# Altium PCB 0.PCB1.PcbDoc (part 6 of 8)
Units mil, origin at the board's own origin, x right, y up, seen from the top; angles counter-clockwise.
Board outline 3897.64 x 3897.64 mil, 6 copper layers (Top Layer, Layer 1, Layer 3, Layer 4, Layer 2, Bottom Layer), stack 60.567 mil thick; 715 components, 563 nets, 2530 pads, 1442 vias.
Unrouted connection lines stored in the file: 6.
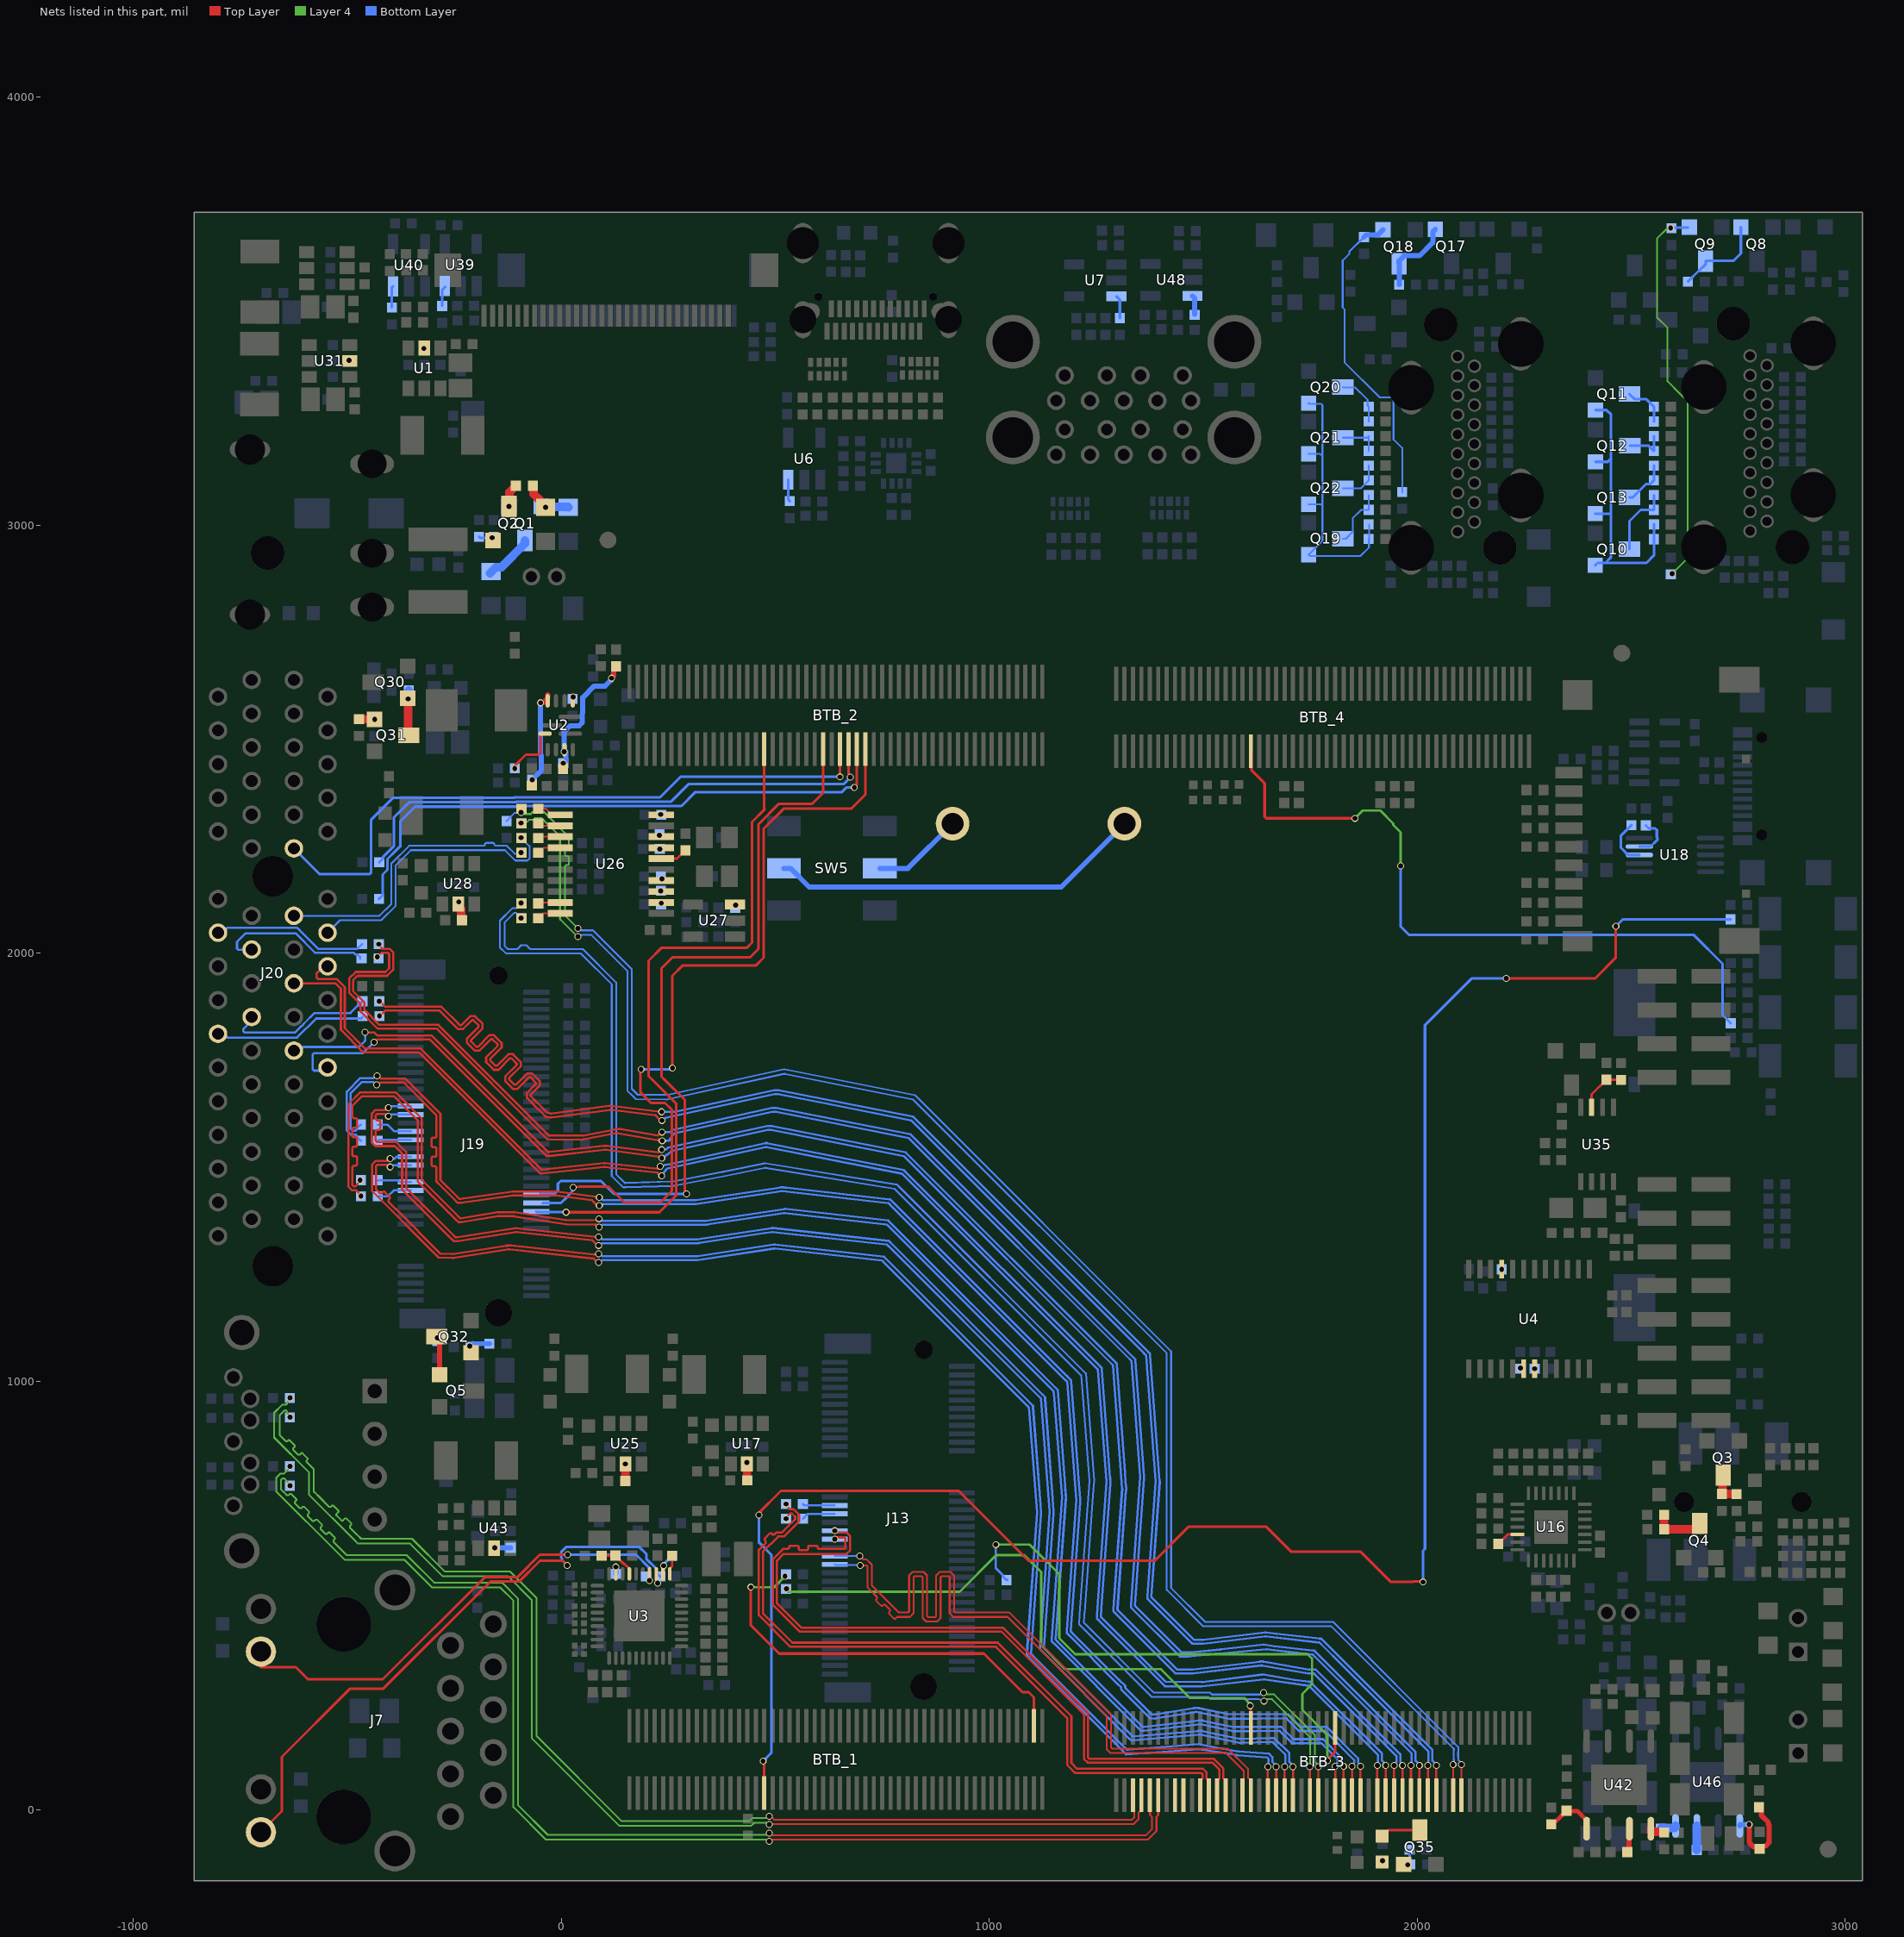
[diagram p10: the nets of this part, all layers, seen from the top]

## Via types
v1: diameter 16.14, hole 11.81, Top Layer to Bottom Layer, tented both sides, 1434 vias
v2: diameter 16.14, hole 11.81, Top Layer to Bottom Layer, 8 vias

## Nets (pads, with @x,y where several pads share a name; then routed paths per layer and width w, separated by ;. In a path a pad name is that pad's centre, name@x,y a point inside that pad or via, vN(x,y) a via of type N, cw(c..) or ccw(c..) an arc to the next point about the centre after c; other vN are vias at no path point) (continued)
NetLED2_1: LED2.1 R128.2
  other v1: 1919.12,-119.98
NetLED2_2: LED2.2 Q35.3 | length 93.7
  Top Layer w6.16: LED2.2@1918.32,-62.6 1932.82,-48.1 Q35.3@2006.02,-48.1
NetQ1_1: Q1.1 Q2.3 R132.2 | length 34.8
  Top Layer w20: Q2.3@-121.2,3063.9 -121.2,3076.78 R132.2@-105.68,3092.3
  other v1: -122,3044.1
NetQ1_2: Q1.2 R127.2 R131.2 R132.1 | length 116.3
  Top Layer w20: R132.1@-66.32,3092.3 -64.52,3090.5 -64.52,3073.32 -48.8,3057.6 -48.8,3052.1 -45.3,3048.6 R131.2@-39.8,3048.6
  Bottom Layer w20: Q1.2@-41.3,3043.5 -40.95,3043.15 15.65,3043.15 R127.2@16.6,3042.2
  other v1: -36.3,3042.1
NetQ1_3: Q1.3 R129.1 | length 117.1
  Bottom Layer w20: R129.1@-166,2888 -151.8,2902.2 -139.4,2902.2 -84.5,2957.1 Q1.3@-84.5,2964.1
NetQ2_1: Q2.1 R133.2 R135.1 | length 31.4
  Bottom Layer w6.16: R135.1@-191.8,2972.92 -189.58,2970.7 R133.2@-161.3,2970.7
  other v1: -161.3,2970.8
NetQ3_3: Q3.3 R122.1 R123.1 | length 79.6
  Top Layer w20: Q3.3@2714.91,780.92 2713.36,779.37 2713.36,738.55 R123.1@2711.81,737 2711.91,736.9 2746.01,736.9 R122.1@2746.11,736.8
NetQ4_3: Q4.3 R124.1 R325.1 | length 125.4
  Top Layer w20: R124.1@2576.71,688.42 2576.9,688.23 2576.9,655.01 R325.1@2577.09,654.82 2652.01,654.82 2660.01,662.82 Q4.3@2660.01,668.22
NetQ5_1: Q5.1 Q32.3 R319.2 | length 88.1
  Top Layer w12: v1(-289.12,1101.85) -284.32,1097.05 Q5.1@-284.32,1015.7
NetQ8_1: Q8.1 Q9.3 R158.2 | length 216.5
  Bottom Layer w6.16: R158.2@2632.62,3569.11 2658.1,3594.59 2658.78,3594.59 2673.7,3609.51 Q9.3@2673.7,3616.51 2674.8,3617.61 2738.7,3617.61 2756.2,3635.11 Q8.1@2756.2,3696.61
NetQ9_1: Q9.1 R159.1 R160.1 | length 912.7
  Layer 4 w4.29: v1(2592.1,3694.4) 2584.7,3694.4 2560,3669.7 2560,3486 2584.7,3461.3 2584.7,3336.3 2612.81,3308.19 2632.2,3288.8 2632.2,2923.46 v1(2595.39,2886.65)
  Bottom Layer w4.29: R159.1@2592.6,2885.12 2594.13,2886.65 v1(2595.39,2886.65)
  Bottom Layer w6.16: R160.1@2594,3695.31 Q9.1@2632.7,3695.31
NetQ10_1: Q10.1 Q11.1 Q12.1 Q13.1 R169.2 R171.1 | length 687.7
  Bottom Layer w6.16: Q13.1@2415.8,3027.21 2450.8,3027.21 2452.2,3028.61 ; Q10.1@2416,2906.51 2421.53,2912.04 2439.63,2912.04 ; Q11.1@2416.1,3268.91 2442.4,3268.91 2447.2,3264.11 2447.91,3264.11 2452.2,3259.82 2452.2,3155.21 ; Q12.1@2416.6,3148.11 2445.1,3148.11 2452.2,3155.21 ; R171.1@2553.42,3002.21 2553.42,2968.01 R169.2@2552.92,2967.51 2552.92,2929.53 2535.43,2912.04 2439.63,2912.04 ; 2439.63,2912.04 2452.2,2924.61 2452.2,3028.61 ; 2452.2,3028.61 2452.2,3155.21
NetQ10_3: Q10.3 R161.2 R162.2 | length 168.1
  Bottom Layer w6.16: Q10.3@2496,2944.01 2496,3009.81 2522.17,3035.99 R161.2@2553.02,3035.99 R162.2@2553.02,3070.39
NetQ11_3: Q11.3 R163.2 R164.2 | length 103.6
  Bottom Layer w6.16: Q11.3@2496.1,3306.41 2508.29,3294.22 2535.59,3294.22 R164.2@2553.02,3276.79 R163.2@2553.02,3242.39
NetQ12_3: Q12.3 R165.2 R166.2 | length 95.8
  Bottom Layer w6.16: Q12.3@2496.6,3185.61 2540.99,3185.61 R165.2@2553.02,3173.59 R166.2@2553.02,3207.99
NetQ13_3: Q13.3 R167.2 R168.2 | length 108.2
  Bottom Layer w6.16: Q13.3@2495.8,3064.71 2502.8,3064.71 2534.15,3096.07 2544.3,3096.07 R167.2@2553.02,3104.79 R168.2@2553.02,3139.19
NetQ17_1: Q17.1 Q18.3 R179.2 | length 185.4
  Bottom Layer w12: R179.2@1957.94,3561.94 1957.94,3610.3 Q18.3@1957.7,3610.54 1957.7,3617.54 1969.7,3629.54 2005.6,3629.54 2036.6,3660.54 2036.6,3685.44 Q17.1@2042.3,3691.14
NetQ18_1: Q18.1 R180.1 R181.1 | length 741.9
  Bottom Layer w4.29: R181.1@1875.6,3673.32 1841.3,3639.02 1841.3,3633.76 1825.75,3618.22 1825.75,3508.89 1830.21,3504.44 1830.21,3380.94 1912.51,3298.64 1939.88,3298.64 1944.72,3293.8 1944.72,3200.61 1965,3180.33 R180.1@1965,3077.48
  Bottom Layer w12: R181.1@1875.6,3673.32 1880.82,3678.54 1908.2,3678.54 Q18.1@1920.2,3690.54
NetQ19_1: Q19.1 Q20.1 Q21.1 Q22.1 R190.2 R192.1 | length 669.2
  Bottom Layer w4.29: Q22.1@1746.4,3049.08 1775.46,3049.08 1778.6,3045.94 ; Q21.1@1746.4,3167.11 1772.63,3167.11 1778.6,3161.14 ; Q20.1@1746.4,3285.14 1748.2,3283.34 1776.08,3283.34 1778.6,3280.83 1778.6,3161.14 ; R190.2@1887.42,3001.84 1887.42,2968.04 1887.22,2967.84 1887.22,2948.06 1867.6,2928.44 1749,2928.44 Q19.1@1746.4,2931.04 1778.6,2963.24 1778.6,3045.94 ; 1778.6,3045.94 1778.6,3161.14
NetQ19_3: Q19.3 R182.2 R183.2 | length 141.4
  Bottom Layer w4.29: Q19.3@1826.4,2968.54 1833.4,2968.54 1849.25,2984.4 1849.25,3016.2 1869,3035.94 R182.2@1886.82,3035.94 R183.2@1886.82,3070.42
NetQ20_3: Q20.3 R184.2 R185.2 | length 121.4
  Bottom Layer w4.29: Q20.3@1826.4,3322.64 1827.22,3321.82 1855.32,3321.82 1884.18,3292.96 1884.18,3279.88 R185.2@1886.82,3277.24 R184.2@1886.82,3242.77
NetQ21_3: Q21.3 R186.2 R187.2 | length 96.4
  Bottom Layer w4.29: Q21.3@1826.4,3204.61 1883.13,3204.61 R187.2@1886.82,3208.3 R186.2@1886.82,3173.83
NetQ22_3: Q22.3 R188.2 R189.2 | length 102.5
  Bottom Layer w4.29: Q22.3@1826.4,3086.58 1868.51,3086.58 R188.2@1886.82,3104.89 R189.2@1886.82,3139.36
NetQ30_1: Q30.1 Q31.3 R255.2 | length 107.7
  Top Layer w20: Q30.1@-358.85,2595.85 v1(-357.5,2594.5) -357.5,2510.7 Q31.3@-356.15,2509.35
  Bottom Layer w20: v1(-357.5,2594.5) -356.05,2595.95 R255.2@-356.05,2613.99
NetQ31_1: Q31.1 R256.2 R257.1 | length 36.4
  Top Layer w20: R256.2@-472.35,2547.25 -472.15,2547.05 -436.35,2547.05 Q31.1@-436.15,2546.85
  other v1: -435.6,2546.8
NetQ32_1: Q32.1 R320.2 R321.1 | length 57.2
  Bottom Layer w12: v1(-213.52,1082.37) R321.1@-212.4,1082.37 ; R321.1@-206.17,1088.6 R321.1@-212.4,1082.37 ; R320.2@-167.48,1088.1 -203.92,1088.1 -209.65,1082.37 R321.1@-212.4,1082.37
NetQ35_1: Q35.1 R334.2 R335.1 | length 37.5
  Bottom Layer w6.16: v1(1977.82,-129.3) 1982.54,-124.58 R334.2@1982.54,-93.8
NetR6_1: R6.1 U1.5
  other v1: -320.7,3413.07
NetR8_1: R8.1 U2.8 | length 133
  Top Layer w6.16: v1(-108.31,2432.09) -108.31,2438.08 -82.52,2463.87 -52.47,2463.87 -47.99,2468.35 -47.99,2511.4 -46.29,2513.1 U2.8@-37.56,2513.1
NetR12_2: R12.2 R13.1 R17.1 U2.11 | length 296.8
  Top Layer w12: v1@117.5,2643.4 117.5,2643.77 122.38,2648.65 122.38,2661.43 R13.1@128.18,2667.23
  Bottom Layer w12: v1(5.01,2444.35) 10.81,2450.15 v1@10.81,2470.79 ; v1(6.71,2470.79) 6.71,2517.29 21.03,2531.61 42.21,2531.61 49.24,2538.64 49.24,2559.82 50.61,2561.19 50.61,2597.61 77.24,2624.24 102.47,2624.24 115.43,2637.2 v1@116.55,2637.2
  other v1: 117.55,2642.7
NetR14_2: R14.2 R18.1 U2.6 | length 218.8
  Top Layer w12: v1(-47.99,2585.29) -47.2,2586.08 -41.04,2586.08 -31.62,2595.51 U2.6@-31.62,2604.18
  Bottom Layer w12: v1(-67.79,2405.63) -45.99,2427.43 -45.99,2461.49 -47.99,2463.49 v1(-47.99,2585.29)
NetR15_2: R15.2 U2.3
  other v1: 28.46,2598.83
NetR38_1: R38.1 U4.6
  other v1: 2240.99,1031.07
NetR39_1: R39.1 U4.7
  other v1: 2274.2,1029.63
NetR43_2: R43.2 U4.21
  other v1: 2197.42,1261.94
NetR53_1: R53.1 U3.39 | length 16
  Bottom Layer w12: R53.1@127.77,550.54 v1(127.77,566.53)
NetR63_2: R63.2 U3.31 | length 43.9
  Top Layer w5.61: U3.31@253.76,550.54 253.76,562.78 259.06,568.09 R63.2@259.06,592.2
NetR65_1: R65.1 U31.5
  other v1: -495.45,3384.9
NetR74_1: R74.1 U3.32 | length 51
  Top Layer w6.16: U3.32@238.01,550.54 238.49,551.02 238.49,568.82 v1(239.23,569.56)
  Bottom Layer w6.16: v1(239.23,569.56) 241.14,571.47 241.14,574.88 R74.1@259.06,592.8
NetR95_1: R95.1 U6.3 | length 51.5
  Bottom Layer w6.16: U6.3@530.6,3106.39 530.6,3059.7 R95.1@534,3056.3
NetR99_1: R99.1 U7.3 | length 54.1
  Bottom Layer w6.16: U7.3@1297.21,3534.63 1305.3,3526.54 R99.1@1305.3,3483.91
NetR121_2: R121.2 U16.26 | length 53.9
  Top Layer w6.16: R121.2@2189.31,620.45 2211.06,642.2 U16.26@2234.23,642.2
NetR139_1: R139.1 R140.1 U17.5 | length 44.2
  Top Layer w12: R139.1@433.4,771.3 R139.1@434.32,772.22 ; U17.5@433.9,807.1 v1(433.9,811.04) U17.5@434.32,810.62
  Top Layer w20: R139.1@434.32,772.22 U17.5@434.32,810.62
NetR221_1: R221.1 R222.1 U25.5 | length 39.9
  Top Layer w20: R222.1@149.8,767.4 150,767.6 150,806.96 v1(150.2,807.16)
NetR225_2: R225.2 U26.3
  other v1: 232.28,2145.93
NetR226_2: R226.2 U26.2
  other v1: 234.08,2117.03
NetR230_2: R230.2 U26.6 | length 64.2
  Top Layer w6.16: U26.6@234.03,2221.2 270.81,2221.2 R230.2@290.18,2240.57
NetR233_1: R233.1 U26.4
  other v1: 235.35,2174.33
NetR234_1: R234.1 U26.10
  other v1: 232.78,2324.63
NetR246_1: R246.1 U27.3
  other v1: 407.69,2112.74
NetR251_1: R251.1 R252.1 U28.5 | length 45.8
  Top Layer w20: v1(-239.28,2120) -239.28,2109.82 -233.38,2103.92 -233.38,2079.2 R251.1@-231.58,2077.4
NetR276_2: R276.2 R277.1 U35.7 | length 111.5
  Top Layer w6.16: U35.7@2407.5,1640.31 2407.5,1670.4 R276.2@2442,1704.9 ; R276.2@2444.2,1705.3 2445.1,1704.4 R277.1@2476.5,1704.4
NetR290_1: R290.1 U18.9 | length 102
  Bottom Layer w6.16: U18.9@2519.02,2249.52 2545.39,2249.52 2560.92,2265.05 2560.92,2270.15 2559.91,2271.17 2559.91,2288.28 2556.3,2291.89 2541.29,2291.89 R290.1@2534.26,2298.92
NetR291_1: R291.1 U18.8 | length 113
  Bottom Layer w6.16: R291.1@2500.66,2299.52 2476.16,2275.02 2476.16,2246.32 2492.64,2229.84 U18.8@2519.02,2229.84
NetR308_1: R308.1 U39.3 | length 48.2
  Bottom Layer w6.16: R308.1@-278.1,3512.3 -278.1,3550 U39.3@-270.7,3557.4
NetR309_1: R309.1 U40.3 | length 50.3
  Bottom Layer w6.16: R309.1@-395.5,3508.8 -395.5,3555.29 U40.3@-392.8,3557.99
NetR317_1: R317.1 R318.1 U43.5 | length 38.9
  Top Layer w12: U43.5@-156.42,610.32 -155.88,610.32 v1(-154.92,611.29)
  Bottom Layer w12: v1(-154.92,611.29) -154.86,611.35 -117.98,611.35 R317.1@-117.92,611.41
NetR323_1: R323.1 U48.3 | length 44.8
  Bottom Layer w12: U48.3@1475.01,3535.53 1479.98,3530.56 R323.1@1479.98,3492.83
NetR343_2: R343.2 U42.4 | length 37.4
  Top Layer w20: U42.4@2545.91,-44.91 2545.91,-49.85 2548.04,-51.97 2574.91,-51.97 R343.2@2576.71,-53.77
NetR344_2: R344.2 U42.3 | length 56.7
  Top Layer w12: R344.2@2491.09,-99.65 2495.19,-95.55 2495.19,-45.63 U42.3@2495.91,-44.91
NetR345_2: R345.2 R346.1 U42.1 | length 127.9
  Top Layer w10: R346.1@2310.5,-32.7 2315.62,-27.58 2324.08,-27.58 R345.2@2348.81,-2.85 ; R345.2@2347.8,-4.1 2373.24,-4.1 2374.01,-3.33 2395.91,-25.23 U42.1@2395.91,-44.91
NetR349_2: R349.2 U46.4 | length 38.5
  Bottom Layer w20: R349.2@2569.01,-44.65 2570.81,-42.85 2601.28,-42.85 2603.41,-40.73 U46.4@2603.41,-38.21
NetR350_2: R350.2 U46.3 | length 56.6
  Bottom Layer w20: R350.2@2652.91,-94.65 2653.16,-94.4 2653.16,-38.46 U46.3@2653.41,-38.21
NetR351_2: R351.2 R352.1 U46.1 | length 212.8
  Top Layer w12: v1(2775.44,-35.22) 2776.23,-36.01 2776.23,-77.73 2786.31,-87.81 2803.66,-87.81 2805.58,-85.88 2813.27,-85.88 2821.7,-77.45 2821.7,-36.38 2820.3,-34.98 2820.3,-30.1 2804.4,-14.2 2804.4,-0.78 R352.1@2798.6,5.02
  Bottom Layer w12: U46.1@2753.41,-38.21 2753.41,-36.95 2755.14,-35.22 v1(2775.44,-35.22)
NetR386_1: R386.1 R387.2 U3.37 | length 89.4
  Top Layer w6.16: R387.2@94.58,592.71 94.96,593.08 R386.1@126.68,593.08 146.1,573.66 147.95,573.66 159.27,562.34 U3.37@159.27,550.54
NetSPK1_1: SPK1.1 SW5.2 | length 875.3
  Bottom Layer w12: SW5.2@520.09,2198.6 535.84,2198.6 579.44,2155 1168.2,2155 SPK1.1@1316.1,2302.9
NetSPK1_2: SPK1.2 SW5.5 | length 213.2
  Bottom Layer w12: SW5.5@744.49,2198.6 810.23,2198.6 SPK1.2@914.53,2302.9
OE: R223.2 U26.8
  other v1: 229.58,2275.53
PCIE20_0_REFCLKN: BTB_3.93
PCIE20_0_REFCLKP: BTB_3.92
PCIE20_0_RXN: BTB_3.98 C297.1 | length 2794
  Top Layer w4.29: v1(486.2,-15.58) 489.41,-15.58 497.58,-23.74 717.32,-23.74 1333.4,-23.75 1338.96,-18.18 1338.96,-6.57 1338.63,-6.24 1338.63,30.4 BTB_3.98@1335.86,33.17
  Layer 4 w4.21: v1(-633.76,916.2) -633.76,919.43 -640.56,926.23 -640.56,929.86 -643.03,932.33 -646.51,932.33 -657.6,921.24 -657.6,874.4 -652,868.8 -650.51,867.31 -643.28,860.08 -639.8,860.08 -637.34,862.54 -634.34,862.54 -622.34,850.55 -622.34,847.55 -626.27,843.62 -626.27,840.62 -614.27,828.62 -611.27,828.62 -607.34,832.55 -604.34,832.55 -592.34,820.55 -592.34,817.55 -594.8,815.09 -594.8,811.6 -578.09,794.89 -578.09,790.41 -578.09,743.09 -569.55,734.55 -568.06,733.06 -541.87,706.87 -538.38,706.87 -535.2,710.04 -532.2,710.04 -520.21,698.05 -520.21,695.05 -525.1,690.15 -525.1,687.15 -513.1,675.15 -510.1,675.15 -505.21,680.05 -502.21,680.05 -490.21,668.05 -490.21,665.05 -493.39,661.87 -493.39,658.39 -478.39,643.39 -476.9,641.9 -467.38,632.38 -348.42,632.38 -271.77,555.72 -119.02,555.72 -57.49,494.19 -57.49,171.54 141.23,-27.18 439.1,-27.18 446.46,-19.81 478.73,-19.81 482.97,-15.58 v1(486.2,-15.58)
PCIE20_0_RXP: BTB_3.97 C298.1 | length 2796.4
  Top Layer w4.29: v1(486.21,-35.26) 487.44,-34.03 713.06,-34.03 1337.66,-34.04 1349.25,-22.45 1349.25,-7.57 1355.54,-1.28 BTB_3.97@1355.54,33.17
  Layer 4 w4.21: v1(-633.76,961.4) -633.76,958.17 -640.56,951.37 -640.56,947.74 -643.03,945.27 -651.87,945.27 -670.54,926.6 -670.54,869.04 -589.3,787.8 -589.3,735.5 -482.41,628.61 -475.06,621.26 -472.11,621.26 -472.02,621.17 -353.07,621.17 -276.41,544.51 -123.67,544.51 -68.7,489.55 -68.7,166.9 136.59,-38.39 443.74,-38.39 451.1,-31.02 478.75,-31.02 482.99,-35.26 v1(486.21,-35.26)
PCIE20_0_TXN: BTB_3.95 C296.1 | length 2849.2
  Top Layer w4.29: v1(486.02,-74.63) 489.23,-74.63 493.5,-70.36 1370.68,-70.36 1390.86,-50.18 1390.86,-17.12 1394.91,-13.07 BTB_3.95@1394.91,33.17
  Layer 4 w4.21: v1(-633.76,801.6) -633.76,798.37 -642,790.13 -642,790.02 -647.37,784.65 -655.5,784.65 -665.51,774.64 -665.51,743.1 -523.44,601.03 -505.4,582.99 -365.49,582.99 -301.28,518.78 -142.73,518.78 -111.61,487.66 -111.61,5.36 -35.86,-70.39 478.56,-70.39 482.8,-74.63 v1(486.02,-74.63)
PCIE20_0_TXP: BTB_3.96 C295.1 | length 2849
  Top Layer w4.29: v1(486.06,-54.94) 488.84,-54.94 493.96,-60.07 1366.42,-60.07 1380.57,-45.92 1380.57,-17.35 1375.85,-12.63 1375.85,32.55 BTB_3.96@1375.23,33.17
  Layer 4 w4.21: v1(-633.76,756.5) -633.76,759.73 -642,767.97 -642,768.08 -647.37,773.44 -650.85,773.44 -654.3,770 -654.3,747.74 -649.67,743.12 -648.19,741.63 -640.47,733.91 -636.98,733.91 -633.74,737.16 -630.74,737.16 -618.74,725.16 -618.74,722.16 -622.23,718.67 -622.23,715.67 -610.23,703.67 -607.23,703.67 -603.74,707.16 -600.74,707.16 -588.74,695.16 -588.74,692.16 -592.23,688.67 -592.23,685.68 -580.23,673.68 -577.23,673.68 -573.75,677.17 -570.75,677.17 -558.75,665.17 -558.75,662.17 -562.24,658.68 -562.24,655.68 -550.24,643.68 -547.24,643.68 -543.75,647.17 -540.75,647.17 -528.75,635.17 -528.75,632.17 -532,628.93 -532,625.44 -517,610.44 -515.51,608.95 -500.76,594.2 -360.85,594.2 -296.63,529.99 -138.09,529.99 -100.4,492.3 -100.4,10 -31.22,-59.18 478.59,-59.18 482.83,-54.94 v1(486.06,-54.94)
PCIE20_1_REFCLKN: BTB_3.85 J13.49 | length 1687.3
  Top Layer w4.29: v1(698.8,570.4) 713.17,570.4 715.68,567.89 715.68,518.96 721.42,513.22 738,496.65 738,493.1 735.75,490.85 735.75,487.84 747.79,475.8 750.8,475.8 753.32,478.32 756.33,478.32 768.38,466.27 768.38,463.26 765.86,460.75 765.86,457.73 777.9,445.69 780.91,445.69 784.92,449.7 795.2,449.7 805.3,449.7 814.72,449.7 823.26,458.24 823.26,542.68 825.39,544.8 842.42,544.8 844.55,542.68 844.55,447.25 852.71,439.09 878.27,439.09 886.42,447.25 886.42,542.68 888.55,544.8 905.58,544.8 907.71,542.68 907.71,458.24 916.25,449.7 1022,449.7 1043.05,449.7 1274.5,218.25 1274.5,140.54 1283.04,132 1553.01,132 1594.86,90.15 1594.86,72.91 1594.54,72.59 1594.54,35.95 BTB_3.85@1591.76,33.17
  Bottom Layer w4.29: J13.49@639.2,572.46 640.23,571.43 697.77,571.43 v1(698.8,570.4)
PCIE20_1_REFCLKP: BTB_3.84 J13.47 | length 1687.2
  Top Layer w4.29: v1(697.35,592.14) 698.17,592.14 705.79,584.52 713.6,584.52 725.97,572.15 725.97,523.23 789.21,459.99 805.3,459.99 810.46,459.99 812.97,462.5 812.97,546.94 821.13,555.09 846.69,555.09 854.84,546.94 854.84,451.51 856.97,449.38 874,449.38 876.13,451.51 876.13,546.94 884.29,555.09 909.85,555.09 918,546.94 918,462.5 920.52,459.99 1022,459.99 1047.31,459.99 1284.79,222.51 1284.79,144.8 1287.3,142.29 1557.28,142.29 1605.15,94.41 1605.15,73.92 1611.45,67.62 BTB_3.84@1611.45,33.17
  Bottom Layer w4.29: J13.47@639.2,592.14 v1(697.35,592.14)
PCIE20_1_RXN: BTB_3.88 J13.43 | length 1685.9
  Top Layer w5.15: v1(639.2,631.51) 642.18,631.51 646.22,635.55 661.74,635.55 663.53,633.76 663.53,610.49 661.74,608.7 637.6,608.7 602.26,608.7 599.24,611.72 599.24,614.05 597.03,616.26 579.31,616.26 577.09,614.05 577.09,608.46 574.88,606.25 557.16,606.25 554.94,608.46 554.94,614.05 552.73,616.26 535.01,616.26 532.79,614.05 532.79,611.72 529.78,608.7 527.2,608.7 518.3,608.7 494.88,585.28 494.88,477.78 557.01,415.65 1028.45,415.65 1221.5,222.6 1221.5,117.93 1229.88,109.55 1520.9,109.55 1537.98,92.47 1537.98,72.89 1532.71,67.62 BTB_3.88@1532.71,33.17
PCIE20_1_RXP: BTB_3.87 J13.41 | length 1684.4
  Top Layer w5.15: v1(639.2,651.2) 642.18,651.2 646.22,647.15 666.54,647.15 675.13,638.57 675.13,605.69 666.54,597.1 519.64,597.1 504.03,581.49 504.03,481.57 560.8,424.8 1032.24,424.8 1230.65,226.39 1230.65,121.72 1233.67,118.7 1524.69,118.7 1547.13,96.26 1547.13,72.89 1552.39,67.62 BTB_3.87@1552.39,33.17
PCIE20_1_TXN: BTB_3.90 C252.1 | length 1622.5
  Top Layer w5.15: v1(525.61,679.25) 525.61,682.22 534.82,691.44 539.09,691.44 546.58,683.94 546.58,677.89 528.85,660.15 516.2,647.5 502.95,647.5 498.02,642.58 493.76,642.58 490.87,645.46 487.74,645.46 475.21,632.93 475.21,629.8 478.09,626.92 478.09,622.65 476.27,620.83 461.72,606.28 461.72,454.3 535.98,380.05 1016.18,380.05 1182.15,214.08 1182.15,104.41 1201.48,85.07 1209.63,85.07 1209.96,85.41 1495.59,85.41 1498.27,82.73 1498.27,72.55 1493.34,67.62 BTB_3.90@1493.34,33.17
PCIE20_1_TXN_R: C252.2 J13.37 | length 78.9
  Bottom Layer w5.15: C252.2@564.97,679.25 576.29,690.57 J13.37@639.2,690.57
PCIE20_1_TXP: BTB_3.89 C251.1 | length 1626.3
  Top Layer w5.15: v1(525.61,713.45) 525.61,710.48 534.82,701.26 543.16,701.26 556.41,688.01 556.41,673.82 520.27,637.68 507.02,637.68 471.55,602.21 471.55,458.37 540.05,389.88 1020.25,389.88 1191.98,218.15 1191.98,108.48 1205.55,94.9 1205.89,95.24 1499.66,95.24 1508.09,86.8 1508.09,72.55 1513.02,67.62 BTB_3.89@1513.02,33.17
PCIE20_1_TXP_R: C251.2 J13.35 | length 75.6
  Bottom Layer w5.15: C251.2@564.97,713.45 568.17,710.25 J13.35@639.2,710.25
PCIE30_PORT0_REF_CLKN: BTB_3.77 R217.2 R219.1 | length 3540.5
  Top Layer w4.29: v1(1749.14,100.02) 1749.24,99.92 BTB_3.77@1749.24,33.17
  Layer 4 w4.21: v1(1641.79,253.32) 1645.66,254.54 1648.77,257.65 1661.1,257.65 1749.69,169.05 1749.69,100.57 v1(1749.14,100.02)
  Bottom Layer w4.29: R219.1@-92.88,2116.63 -104.15,2105.36 -114.1,2105.36 -143,2076.46 -143,2013.75 -128.75,1999.5 46.26,1999.5 118.21,1927.55 118.21,1488.42 118.21,1479.84 140.29,1457.76 144.56,1453.49 150.8,1453.49 262.77,1456.64 263.96,1456.87 379.96,1479.63 473.86,1498.48 476.11,1498.93 476.88,1498.93 778.46,1450.18 1215.48,1013.15 1234.06,768.23 1234.06,767.85 1233.99,766.84 1211.48,455.42 1209.9,433.5 1210.01,432.89 1211.27,431.64 1379.99,262.91 1511.21,262.91 1516.01,258.11 1628.81,258.11 v1(1641.79,253.32)
  other v1: -94.08,2117.73
PCIE30_PORT0_REF_CLKN_R: R217.1 U26.19 | length 52.2
  Top Layer w4.29: R217.1@-53.52,2116.63 -51.31,2118.84 U26.19@-2.19,2118.84
PCIE30_PORT0_REF_CLKP: BTB_3.76 R216.2 R220.1 | length 3536.8
  Top Layer w4.29: BTB_3.76@1768.93,33.17 1768.93,99.95 v1(1769.02,100.03)
  Layer 4 w4.21: v1(1641.2,273.2) 1644.43,273.2 1648.77,268.86 1665.74,268.86 1760.9,173.7 1760.9,111.38 1769.02,103.26 v1(1769.02,100.03)
  Bottom Layer w4.29: v1(-94.08,2082.73) -102.53,2091.19 -102.53,2092.15 -105.05,2094.66 -109.66,2094.66 -132.3,2072.03 -132.3,2017.6 -124.49,2009.79 -112.3,2009.79 -102.14,2009.79 -97.88,2014.05 -97.88,2014.69 -93.63,2018.95 -80.85,2018.95 -76.59,2014.69 -76.59,2014.05 -72.34,2009.79 -48.9,2009.79 50.52,2009.79 128.5,1931.81 128.5,1484.1 144.43,1468.17 148.82,1463.78 150.66,1463.78 260.75,1466.88 261.93,1467.11 378.92,1489.91 473.67,1508.93 475.09,1509.22 477.71,1509.22 784.83,1459.57 788.16,1456.24 1217.42,1026.98 1222.02,1022.38 1226.29,1018.11 1245.21,768.65 1245.21,767.45 1245.17,766.86 1243.76,747.34 1222.96,459.58 ; 1222.6,459.3 1222.51,458.28 1222.26,455.39 1222.21,454.77 1222.21,451.02 1221.89,450.7 1221.01,438.57 1221.01,436.64 1225.59,432.06 1381.74,275.71 1384.26,273.2 1386.03,273.2 1515.47,273.2 1520.27,268.4 1633.19,268.4 1637.99,273.2 v1(1641.2,273.2)
PCIE30_PORT0_REF_CLKP_R: R216.1 U26.20 | length 56.1
  Top Layer w4.29: R216.1@-53.52,2081.63 -41.9,2093.25 U26.20@-2.19,2093.25
PCIE30_PORT0_RX0N: BTB_3.82 J19.41 | length 3241.3
  Top Layer w5.15: v1(-399.4,1520.6) -402.37,1520.6 -407.64,1515.33 -432.89,1515.33 -441.27,1506.96 -441.27,1444.53 -290.09,1293.34 -286.09,1289.35 -254.11,1288.32 -252.78,1288.32 -251.7,1288.49 -123.03,1308.37 -121.45,1308.61 -120.77,1308.61 75.76,1286.99 79.31,1283.43 84.56,1278.19 v1(87.53,1278.19) ; BTB_3.82@1650.82,33.17 v1(1650.82,100.1)
  Bottom Layer w5.15: v1(-399.4,1520.6) -388.96,1520.6 -384.59,1524.97 J19.41@-351.5,1524.97 ; v1(87.53,1278.19) 90.51,1278.19 95.77,1283.46 319.18,1283.46 496.56,1310.13 498.13,1310.37 498.8,1310.37 749.82,1282.44 753.36,1278.9 1089.51,942.75 1093.26,939 1111.82,694.31 1111.88,693.44 1111.88,693.06 1088.3,366.7 1088.3,360.26 1092.49,356.07 1319.51,129.05 ; 1320.6,128.4 1489.73,140.53 1549.3,132.34 1549.64,132.29 1576,127.38 1577.33,127.13 1577.74,126.73 1580.62,126.52 1580.95,126.46 1581.46,126.46 1649.69,121.51 1652.56,118.65 1652.56,101.84 v1(1650.82,100.1)
PCIE30_PORT0_RX0P: BTB_3.81 J19.43 | length 3242.1
  Top Layer w5.15: v1(-399.4,1500.92) -402.37,1500.92 -407.64,1506.18 -429.1,1506.18 -432.12,1503.17 -432.12,1448.38 -432.12,1448.32 -430.33,1446.53 -423.56,1439.76 -419.3,1439.76 -415.68,1443.38 -412.55,1443.38 -400.02,1430.85 -400.02,1427.72 -403.63,1424.1 -403.63,1419.83 -387.97,1404.17 -386.75,1402.95 -386.15,1402.35 -282.17,1298.37 -253.96,1297.47 -253.49,1297.47 -252.25,1297.66 -129.45,1316.64 -128.87,1317.16 -127.35,1317.18 -125.81,1317.2 -125.52,1317.24 -125,1317.76 -117.33,1317.76 -116.97,1317.4 76.26,1296.14 85.79,1296.14 v1(87.53,1297.88) ; BTB_3.81@1670.5,33.17 v1(1670.5,100.1)
  Bottom Layer w5.15: v1(-399.4,1500.92) -395.03,1505.29 J19.43@-351.5,1505.29 ; v1(87.53,1297.88) 90.51,1297.88 95.77,1292.61 318.5,1292.61 496.38,1319.36 497.44,1319.52 499.31,1319.52 754.02,1291.18 757.56,1287.63 1095.9,949.3 1102.41,942.79 1102.41,939.35 1119.71,711.25 1119.98,710.98 1119.98,707.71 1120.76,697.33 1121.03,697.06 1121.03,689.45 1120.78,689.2 1097.45,366.37 1097.45,364.05 1101.92,359.58 1317.25,144.25 1321.73,139.77 1324.06,139.77 1490.84,152.44 1491.51,152.44 1493.16,152.13 1581.01,135.75 1581.8,135.61 1653.75,130.39 1661.71,122.44 1661.71,111.34 1670.5,102.54 v1(1670.5,100.1)
PCIE30_PORT0_RX1N: BTB_3.80 J19.29 | length 3395.1
  Top Layer w5.15: v1(-403.4,1639.3) -406.37,1639.3 -411.64,1634.03 -434.02,1634.03 -442.4,1625.66 -442.4,1558.18 -434.02,1549.8 -389.04,1549.8 -371.59,1532.35 -371.59,1448.45 -254.71,1331.57 -250.84,1327.7 -241.41,1327.7 -105.98,1348.63 -104.39,1348.88 -103.71,1348.88 73.25,1329.4 76.8,1325.85 81.08,1321.57 85.09,1317.56 v1(87.53,1317.56) ; BTB_3.80@1690.19,33.17 v1(1690.19,100.1)
  Bottom Layer w5.15: v1(-403.4,1639.3) -400.43,1639.3 -396.65,1643.08 J19.29@-351.5,1643.08 ; v1(87.53,1317.56) 90.51,1317.56 95.77,1322.83 321.14,1322.83 321.69,1323.38 323.18,1323.6 476.5,1346.66 493.7,1349.25 494.37,1349.25 761.42,1319.54 764.97,1315.99 1117.73,963.23 1121.47,959.49 1141.4,696.73 1141.47,695.86 1141.47,695.48 1118.73,380.77 1118.73,374.33 1327.31,165.75 1331.5,161.56 1338.02,161.56 1491.78,174.57 1493.31,174.7 1494.06,174.7 1584.59,156.09 1586.02,155.8 1587.64,155.8 1659.73,157.61 1661.89,157.61 1666.15,153.45 1688.91,131.24 1691.93,128.22 1691.93,101.84 v1(1690.19,100.1)
PCIE30_PORT0_RX1P: BTB_3.79 J19.31 | length 3394.8
  Top Layer w5.15: v1(-403.4,1619.62) -406.37,1619.62 -411.64,1624.88 -430.23,1624.88 -433.25,1621.87 -433.25,1619.13 -433.25,1613.01 -430.23,1609.99 -424.37,1609.99 -422.15,1607.78 -422.15,1590.06 -424.37,1587.84 -430.23,1587.84 -433.25,1584.83 -433.25,1561.97 -431.38,1560.1 -430.23,1558.95 -385.25,1558.95 -362.44,1536.14 -362.44,1452.24 -249.27,1339.07 -247.05,1336.85 -243.56,1336.85 -242.32,1337.19 -106.79,1358.14 -105.2,1358.38 -104.52,1358.38 v1(87.53,1337.25) ; BTB_3.79@1709.87,33.17 v1(1709.87,100.1)
  Bottom Layer w5.15: v1(-403.4,1619.62) -400.43,1619.62 -396.64,1623.4 J19.31@-351.5,1623.4 ; v1(87.53,1337.25) 90.51,1337.25 95.77,1331.98 317.35,1331.98 491.96,1358.24 493.02,1358.4 494.88,1358.4 765.62,1328.28 769.17,1324.73 1124.61,969.29 1130.62,963.28 1130.62,959.83 1148.27,727.16 1148.54,726.9 1148.54,723.62 1150.35,699.75 1150.62,699.48 1150.62,691.87 1150.36,691.62 1127.88,380.44 1127.88,378.12 1132.33,373.67 1330.77,175.23 1335.29,170.71 1337.64,170.71 1487.17,183.36 1487.44,183.63 1489.79,183.63 1490,183.85 1497.67,183.85 1498.37,183.15 1585.41,165.26 1586.95,164.95 1587.53,164.95 1657.95,166.72 1657.99,166.76 1665.68,166.76 1667.04,165.4 1667.69,165.4 1701.08,132.01 1701.08,111.34 1709.87,102.54 v1(1709.87,100.1)
PCIE30_PORT0_TX0N: BTB_3.74 C177.1 | length 3740.5
  Top Layer w5.15: v1(-469.7,1470.1) -469.7,1467.13 -476.95,1459.88 -476.95,1459.24 -480.59,1455.59 -484.85,1455.59 -487.87,1458.61 -487.87,1476.44 -487.87,1501.17 -484.85,1504.18 -479.46,1504.18 -477.25,1506.4 -477.25,1524.12 -479.46,1526.33 -485.66,1526.33 -487.87,1528.55 -487.87,1546.27 -485.66,1548.48 -479.46,1548.48 -477.25,1550.7 -477.25,1568.42 -479.46,1570.63 -485.66,1570.63 -487.87,1572.85 -487.87,1590.57 -485.66,1592.78 -479.46,1592.78 -477.25,1595 -477.25,1612.72 -479.46,1614.93 -484.85,1614.93 -487.87,1617.95 -487.87,1644.13 -484.73,1647.26 -465.65,1666.35 -390.79,1666.35 -335,1610.56 -335,1467.1 -244.39,1376.5 -240.21,1372.31 -233.16,1372.31 -148.41,1385.7 -109.88,1385.7 -108.81,1385.54 12.69,1367.1 78.11,1366.13 ; 80.56,1366.78 86.97,1360.37 v1(88.38,1360.37) ; BTB_3.74@1808.3,33.17 v1(1808.27,101.06)
  Bottom Layer w5.15: v1(88.38,1360.37) 90.72,1360.37 96.58,1366.23 320.62,1366.23 324.66,1365.94 327.18,1365.94 328.02,1366.07 329.08,1366.23 341.99,1366.23 342.54,1366.77 520.29,1393.31 521.86,1393.54 522.53,1393.54 755.82,1367.3 761.32,1366.22 1150.56,976.98 1151.69,970.97 1169.98,729.77 1170.05,728.9 1170.05,728.52 1146.24,399.06 1146.24,392.62 1150.42,388.43 1349.85,188.71 1350.7,187.86 1353.72,184.84 1355.16,183.7 1361.9,183.7 1492.94,198.73 1494.74,198.94 1495.59,198.94 1517.08,194.26 1571.53,182.44 1573.18,182.44 1678.62,183.84 1707.31,155.15 1776.07,155.15 1813.54,117.67 1813.54,109.3 1808.27,104.03 v1(1808.27,101.06)
PCIE30_PORT0_TX0N_R: C177.2 J19.47 | length 78.7
  Bottom Layer w5.15: C177.2@-428.5,1470.1 -380.29,1470.1 -376.11,1465.92 J19.47@-351.5,1465.92
PCIE30_PORT0_TX0P: BTB_3.73 C178.1 | length 3741.1
  Top Layer w5.15: v1(-467.86,1432.7) -467.86,1435.61 -478.69,1446.44 -488.64,1446.44 -497.02,1454.82 -497.02,1647.92 -469.44,1675.5 -387,1675.5 -325.85,1614.35 -325.85,1470.89 -241.22,1386.26 -236.42,1381.46 -233.88,1381.46 -149.13,1394.85 -107.04,1394.85 -106.94,1394.85 9.85,1376.99 81.71,1375.93 85.83,1380.05 v1(88.8,1380.05) ; BTB_3.73@1827.98,33.17 v1(1827.96,101.06)
  Bottom Layer w5.15: v1(88.8,1380.05) 91.77,1380.05 96.45,1375.38 338.2,1375.38 520.71,1402.62 522.27,1402.86 522.94,1402.86 764.5,1375.98 1157.33,983.15 1160.15,980.32 1177.02,758 1177.28,757.73 1177.28,754.46 1178.93,732.79 1179.2,732.52 1179.2,724.91 1178.94,724.66 1155.39,398.73 1155.39,396.41 1159.86,391.94 1354.32,197.48 1358.95,192.85 1361.37,192.85 1468.44,205.13 1468.55,205.15 1490.92,208.07 1491.04,208.09 1499.15,208.09 1499.87,207.37 1518.06,203.41 1518.21,203.39 1569.19,193.4 1682.41,192.99 1711.1,164.3 1779.86,164.3 1822.69,121.46 1822.69,109.3 1827.96,104.03 v1(1827.96,101.06)
PCIE30_PORT0_TX0P_R: C178.2 J19.49 | length 82.6
  Bottom Layer w5.15: C178.2@-428.5,1432.7 -404.45,1432.7 -390.93,1446.23 J19.49@-351.5,1446.23
PCIE30_PORT0_TX1N: BTB_3.72 C175.1 | length 3709.2
  Top Layer w5.15: v1(-430.69,1692.91) -427.71,1692.91 -422.35,1698.27 -368.02,1698.27 -291.2,1621.45 -291.2,1596.78 -291.2,1572.05 -294.22,1569.04 -300.17,1569.04 -302.38,1566.82 -302.38,1549.1 -300.17,1546.89 -293.42,1546.89 -291.2,1544.67 -291.2,1526.95 -293.42,1524.74 -300.17,1524.74 -302.38,1522.52 -302.38,1504.8 -300.17,1502.59 -294.22,1502.59 -291.2,1499.57 -291.2,1479.7 -291.2,1466.76 -288.55,1464.11 ; -288.55,1464.09 -246.28,1421.81 -246.28,1421.74 -243.26,1418.72 -242.01,1417.57 -233.83,1417.57 -233.62,1417.77 -111.92,1434.41 -10.95,1434.41 71.6,1423.34 75.02,1419.92 77.37,1417.57 86.03,1408.91 89,1408.91 v1(89,1410.55) ; 1847.64,75.15 v1(1847.64,101.06) ; BTB_3.72@1847.67,33.17 1847.67,75.12
  Bottom Layer w5.15: C175.1@-467.86,1600 -477.08,1590.78 -477.08,1588.69 -480.1,1585.67 -487.23,1585.67 -491.75,1590.2 -491.75,1673.25 -465.41,1699.59 -439.2,1699.59 -432.52,1692.91 v1(-430.69,1692.91) ; v1(89,1410.55) 89,1408.91 91.97,1408.91 97.24,1414.18 315.19,1414.18 515.14,1444.25 515.81,1444.25 517.28,1444.09 764.7,1416.56 768.24,1413.02 1178.9,1002.36 1182.65,998.61 1203.58,722.66 1203.64,721.79 1203.64,721.41 1181.75,418.4 1181.75,411.96 1185.94,407.78 1300.17,293.55 1308.75,284.97 1308.75,280.4 1376.3,212.84 1385.68,212.38 1387.29,212.42 1389.55,212.7 1480.41,227.54 1482.48,227.88 1483.41,227.88 1563.74,211.57 1565.27,211.57 1694.72,212.84 1724.11,183.45 1784.95,183.45 1852.91,115.49 1852.91,109.3 1847.64,104.03 v1(1847.64,101.06)
PCIE30_PORT0_TX1N_R: C175.2 J19.35 | length 83.6
  Bottom Layer w5.15: C175.2@-428.5,1600 -405.67,1600 -389.74,1584.06 J19.35@-351.54,1584.06
PCIE30_PORT0_TX1P: BTB_3.71 C176.1 | length 3714.5
  Top Layer w5.15: v1(-429.8,1714.1) -427.97,1714.1 -421.29,1707.42 -364.23,1707.42 -282.05,1625.24 -282.05,1470.55 -242.93,1431.43 -238.22,1426.72 -235.73,1426.72 -112.54,1443.56 -10.33,1443.56 v1(89,1430.24) ; 1867.33,75.15 v1(1867.33,101.06) ; BTB_3.71@1867.35,33.17 1867.35,75.12
  Bottom Layer w5.15: C176.1@-467.86,1562.2 -477.08,1571.42 -477.08,1573.51 -480.1,1576.53 -491.02,1576.53 -500.9,1586.41 -500.9,1677.04 -469.2,1708.74 -438.14,1708.74 -432.77,1714.1 v1(-429.8,1714.1) ; v1(89,1430.24) 89,1428.6 91.97,1428.6 97.24,1423.33 314.51,1423.33 511.09,1452.9 511.59,1453.4 519.26,1453.4 519.63,1453.03 523.75,1452.58 526.69,1452.58 527.06,1452.21 765.2,1425.71 768.49,1425.71 772.44,1421.76 1182.05,1012.14 1191.8,1002.4 1191.8,998.96 1207.76,788.45 1208.03,788.18 1208.03,784.91 1212.53,725.68 1212.79,725.41 1212.79,717.8 1212.54,717.55 1190.9,418.07 1190.9,415.75 1195.36,411.29 1303.96,302.7 1317.9,288.76 1317.9,284.19 1380.09,221.99 1387.47,221.86 1388.34,221.85 1388.81,221.85 1475.93,236.08 1476.44,236.59 1478.71,236.62 1479.12,237.03 1487.2,237.03 1489.6,236.79 1557.11,223 1698.51,221.99 1727.9,192.6 1788.74,192.6 1862.06,119.28 1862.06,109.3 1867.33,104.03 v1(1867.33,101.06)
PCIE30_PORT0_TX1P_R: C176.2 J19.37 | length 77.9
  Bottom Layer w5.15: C176.2@-428.5,1562.2 -426.36,1564.34 J19.37@-351.5,1564.34
PCIE30_PORT1_REF_CLKN: BTB_3.59 R243.2 R244.1 | length 3896.9
  Top Layer w4.29: BTB_3.59@2103.57,33.17 v1(2103.57,105.2)
  Layer 4 w4.21: v1(-93.88,2329.17) -90.65,2329.17 -87.07,2325.58 -70.85,2325.58 -66.43,2330.01 -40.02,2330.01 8.6,2281.39 8.6,2274.1 8.6,2271.99 11.07,2269.53 16.15,2269.53 18.27,2267.41 18.27,2250.44 16.15,2248.32 10.72,2248.32 8.6,2246.2 8.6,2229.23 10.72,2227.11 16.15,2227.11 18.27,2224.99 18.27,2208.02 16.15,2205.9 11.07,2205.9 8.6,2203.43 8.6,2182.5 8.6,2088.64 v1(38.84,2058.4)
  Bottom Layer w4.29: R244.1@-127.7,2308.98 -108.39,2328.29 -94.76,2328.29 v1(-93.88,2329.17) ; v1(38.84,2058.4) 42.05,2058.4 46.75,2053.7 74.4,2053.7 165.04,1963.06 165.04,1683.57 179.12,1669.5 249.34,1669.5 519.63,1728.64 521.63,1728.64 522.05,1728.62 528.07,1728.27 826.91,1668.49 1425.19,1070.21 1425.19,517.41 1504.51,438.09 1803.76,438.09 2095.89,145.96 2095.89,133.89 2095.58,133.59 2095.58,121.81 2095.89,121.51 2095.89,116.09 2103.57,108.41 v1(2103.57,105.2)
PCIE30_PORT1_REF_CLKN_R: R243.1 U26.11 | length 58.6
  Top Layer w4.29: R243.1@-53.32,2337.63 -35.09,2337.63 -29.58,2332.12 -29.58,2329.29 -23.85,2323.56 U26.11@-2.19,2323.56
PCIE30_PORT1_REF_CLKP: BTB_3.60 R242.2 R245.1 | length 3811.2
  Top Layer w4.29: v1(2083.68,105.01) 2083.89,104.8 BTB_3.60@2083.89,33.17
  Layer 4 w4.21: v1(-93.88,2304.4) -91.6,2306.68 -80.15,2306.68 -75.17,2311.66 -65.09,2311.66 -60.66,2316.09 -45.79,2316.09 -2.61,2272.91 -2.61,2080.16 -1.68,2079.23 -1.68,2078.87 38.48,2038.71 v1(38.84,2038.71)
  Bottom Layer w4.29: v1(38.84,2038.71) 42.05,2038.71 46.75,2043.41 70.14,2043.41 154.75,1958.79 154.75,1679.31 170.64,1663.42 174.85,1659.21 245.64,1658.53 247.3,1658.53 250.46,1659.21 520.74,1718.35 521.33,1718.35 522.18,1718.3 524.3,1717.88 822.65,1658.2 1414.9,1065.95 1414.9,513.15 1500.25,427.8 1799.5,427.8 2085.6,141.7 2085.6,138.16 2085.29,137.85 2085.29,117.55 2085.6,117.24 2085.6,106.93 v1(2083.68,105.01)
PCIE30_PORT1_REF_CLKP_R: R242.1 U26.12 | length 53.3
  Top Layer w4.29: R242.1@-53.32,2303.3 -47.99,2297.97 U26.12@-2.19,2297.97
PCIE30_PORT1_RX0N: BTB_3.69 J20.A17 | length 3798.8
  Top Layer w5.15: J20.A17@-624.47,1930.14 -527.44,1930.14 -514.65,1917.35 -514.65,1821.31 -461.84,1768.5 -331.78,1768.5 -48.86,1485.58 ; -45.7,1485.55 -43.71,1485.55 99.94,1501.09 101.19,1501.22 101.75,1501.22 223.74,1488.07 224.32,1487.98 227.85,1484.45 231.92,1480.37 v1(234.9,1480.37) ; BTB_3.69@1906.72,33.17 v1(1906.72,102.6)
  Bottom Layer w5.15: v1(234.9,1480.37) 244.72,1494.28 247.29,1496.85 250.99,1497.66 476.75,1547.06 479.15,1547.59 480.21,1547.59 796.25,1485.31 799.32,1482.24 1250.27,1031.29 1254.02,1027.54 1273.83,766.38 1273.89,765.51 1273.89,765.13 1252.65,471.08 1251.6,453.94 1251.6,446.36 1255.53,442.43 1410.16,287.8 1496.4,287.8 1641.2,303.99 1642.66,304.16 1643.32,304.16 1746.2,289.12 1749.55,285.76 1908.46,126.85 1908.46,104.34 v1(1906.72,102.6)
PCIE30_PORT1_RX0P: BTB_3.68 J20.A16 | length 3801.9
  Top Layer w5.15: J20.A16@-545.73,1969.51 -555.59,1969.51 -571.2,1953.9 -571.2,1943.02 -568.18,1940 -524.36,1940 -505.5,1921.14 -505.5,1825.1 -458.05,1777.65 -327.99,1777.65 -45.07,1494.73 ; -44.2,1494.7 99.93,1510.29 100.7,1510.37 102.24,1510.37 224.24,1497.22 226.65,1497.22 231.51,1502.09 v1(231.51,1502.17) ; BTB_3.68@1926.41,33.17 v1(1926.41,102.6)
  Bottom Layer w5.15: v1(231.51,1502.17) 232.66,1501.02 234.76,1501.02 236.89,1501.02 241.89,1505.55 244.22,1505.55 249.81,1506.77 251.68,1507.18 476.65,1556.41 478.16,1556.74 481.1,1556.74 800.75,1493.75 803.82,1490.68 1257.57,1036.93 1259.08,1035.42 ; 1259.49,1035.01 1263.17,1031.33 1263.17,1027.89 1282.33,775.23 1282.6,774.96 1282.6,771.69 1282.78,769.39 1283.04,769.12 1283.04,761.52 1282.79,761.26 1261.8,470.75 1261.79,470.42 1261.3,450.7 ; 1260.75,450.15 1412.39,298.51 1496.82,297.44 1499.28,297.44 1638.4,315.36 1713.21,303.19 1713.32,303.17 1746.86,298.27 1749.99,298.27 1753.87,294.38 1917.61,130.64 1917.61,114.37 1926.41,105.57 v1(1926.41,102.6)
PCIE30_PORT1_RX1N: BTB_3.67 J20.A22 | length 3758.5
  Top Layer w5.15: v1(-437.4,1792.3) -435.81,1792.3 -428.89,1799.22 -306.82,1799.22 -38.36,1530.76 -34.17,1526.57 -27.43,1526.57 102.29,1541.33 102.91,1541.33 104.35,1541.15 226.26,1525.33 ; 227.74,1525.88 232.09,1521.53 v1(235.07,1521.53) ; BTB_3.67@1946.09,33.17 v1(1946.09,102.6)
  Bottom Layer w5.15: J20.A22@-555.2,1727.6 -556.81,1725.99 -577.48,1725.99 -580.5,1729 -580.5,1763.78 -577.48,1766.8 -462.9,1766.8 v1(-437.4,1792.3) ; J20.A22@-541.2,1738 J20.A22@-539.2,1736 ; v1(235.07,1521.53) 239.84,1522.91 247.39,1530.46 249.47,1530.46 257.21,1538.21 482.44,1587.49 491.32,1587.49 609.45,1564.21 801.08,1525.88 1285.19,1041.77 1288.94,1038.02 1310.75,750.41 1310.82,749.54 1310.82,749.16 1290.59,469.21 1290.59,462.77 1294.78,458.58 1434.1,319.26 1435.61,317.75 1474.05,317.75 1476.18,317.9 1636.08,336.47 1636.82,336.47 1638.54,336.18 1745.12,318.05 1746.4,318.04 1754.38,318.05 1758.65,318.05 1760.16,316.54 1951.36,125.34 1951.36,110.84 1946.09,105.57 v1(1946.09,102.6)
PCIE30_PORT1_RX1P: BTB_3.66 J20.A21 | length 3768
  Top Layer w5.15: v1(-458,1815.3) -436.71,1815.3 -429.79,1808.38 -303.03,1808.38 -30.38,1535.72 -27.95,1535.72 98.41,1550.1 98.79,1550.48 106.49,1550.48 107.76,1550.46 226.66,1535.03 232.84,1541.22 v1(234.89,1541.22) ; BTB_3.66@1965.78,33.17 v1(1965.78,102.6)
  Bottom Layer w5.15: J20.A21@-624.47,1772.66 -617.17,1779.96 -603.72,1779.96 -602.38,1781.3 -472.3,1781.3 -458,1795.6 v1(-458,1815.3) ; v1(234.89,1541.22) 239.4,1541.82 245.42,1541.82 249.48,1545.88 481.45,1596.64 492.21,1596.64 804.87,1535.03 1295.3,1044.6 ; 1295.56,1044.34 1298.09,1041.81 1298.09,1038.37 1317.1,787.66 1317.37,787.4 1317.37,784.12 1319.7,753.43 1319.97,753.16 1319.97,745.55 1319.71,745.3 1299.74,468.88 1299.74,466.56 1304.2,462.1 1439.1,327.2 1474.78,327.05 1475.35,327.05 1475.65,327.05 1632.3,345.25 1632.68,345.62 1640.36,345.62 1640.93,345.06 1649.12,343.66 ; 1649.16,343.66 1745.89,327.2 1762.44,327.2 1960.51,129.13 1960.51,110.84 1965.78,105.57 v1(1965.78,102.6)
PCIE30_PORT1_TX0N: BTB_3.65 C190.1 | length 3897.2
  Top Layer w5.15: v1(-429.62,1991.5) -419.5,2001.62 -404.87,2001.62 -401.85,1998.61 -401.85,1965.1 -410.4,1956.55 -479.79,1956.55 -495.05,1941.29 -495.05,1907.73 -468.65,1881.33 -468.65,1863.88 -428.47,1823.7 -290.52,1823.7 -31.78,1564.97 47.63,1564.55 51.23,1564.97 130.2,1580.23 131.14,1580.23 133.23,1579.86 226.08,1563.72 ; 227.5,1564.97 228.16,1564.3 233.91,1564.3 v1(236.01,1562.2) ; BTB_3.65@1985.46,33.17 v1(1985.46,102.6)
  Bottom Layer w5.15: v1(236.01,1562.2) 251.45,1562.2 253.36,1564.1 259.82,1574.18 265.25,1579.62 268.77,1580.39 493.64,1629.59 502.52,1629.59 620.65,1606.31 812.28,1567.98 1328.43,1051.83 1332.18,1048.08 1352.65,778.1 1352.72,777.23 1352.72,776.85 1331.18,478.74 1331.18,472.3 1335.35,467.91 1445.79,357.47 1465.58,357.47 1471.92,358.01 1647.3,374.65 1647.85,374.65 1649.13,374.49 1756.17,361.63 1759.67,358.13 1987.2,130.6 1987.2,104.34 v1(1985.46,102.6)
PCIE30_PORT1_TX0N_R: C190.2 J20.B15 | length 375.7
  Bottom Layer w5.15: J20.B15@-721.5,2008.2 -754.18,2008.2 -757.2,2011.22 -757.2,2027 -737.3,2046.9 -620.7,2046.9 -575.1,2001.3 -484,2001.3 -479.92,1997.22 -475.3,1997.22 -469.9,1991.82 C190.2@-469.9,1987.2
PCIE30_PORT1_TX0P: BTB_3.64 C189.1 | length 3911.6
  Top Layer w5.15: v1(-425.82,2021.5) -425.82,2018.53 -418.07,2010.77 -401.08,2010.77 -392.7,2002.4 -392.7,1961.31 -406.61,1947.4 -476,1947.4 -485.9,1937.5 -485.9,1911.52 -459.5,1885.12 -459.5,1867.67 -424.68,1832.85 -286.73,1832.85 -27.99,1574.12 51.92,1574.66 53.24,1574.67 126.16,1588.77 126.77,1589.38 134.93,1589.38 138.96,1589.22 225.78,1574.12 234.07,1582.4 v1(235.5,1582.4) ; BTB_3.64@2005.15,33.17 v1(2005.15,102.6)
  Bottom Layer w5.15: v1(235.5,1582.4) 255.09,1582.4 260.68,1587.98 492.65,1638.74 503.41,1638.74 816.07,1577.13 1337.3,1055.9 1341.33,1051.87 1341.33,1048.43 1360.75,792.37 1361.02,792.11 1361.02,788.83 1361.6,781.12 1361.87,780.85 1361.87,773.24 1361.61,772.99 1340.33,478.41 1340.33,476.1 1344.79,471.63 1446.57,369.7 1449.59,366.68 1451.78,366.68 1470.98,367.15 1471.48,367.16 1541.04,373.76 1541.19,373.78 1641.49,385.49 1666.95,381.58 1667.19,381.54 1756.72,370.78 1759.96,370.78 1764.17,366.57 1996.35,134.39 1996.35,113.84 2005.15,105.04 v1(2005.15,102.6)
PCIE30_PORT1_TX0P_R: C189.2 J20.B14 | length 365.9
  Bottom Layer w5.15: J20.B14@-801.64,2048.25 -791.31,2048.25 -780.25,2059.31 -624.46,2059.31 ccw(c-624.46,2087.54) -618.98,2059.85 -616.85,2059.85 -612.25,2055.25 -567.7,2010.7 -475.98,2010.7 C189.2@-465.18,2021.5
PCIE30_PORT1_TX1N: BTB_3.63 C192.1 | length 3949.6
  Top Layer w5.15: v1(-424.62,1853.5) -423.4,1853.5 -410.9,1866 -283.8,1866 -283.8,1865.89 -247.6,1829.7 -243.86,1825.95 -241.13,1823.23 -229.16,1823.23 -208.43,1843.96 -205.3,1843.96 -192.77,1831.43 -192.77,1828.3 -219.78,1801.29 -219.78,1790.45 -201.8,1772.47 -190.96,1772.47 -163.95,1799.48 -160.82,1799.48 -148.29,1786.95 -148.29,1783.82 -175.3,1756.81 -175.3,1745.97 -157.32,1728 -146.48,1728 -119.48,1755.01 -116.34,1755.01 -103.81,1742.48 -103.81,1739.34 -130.82,1712.33 -130.82,1701.5 -112.84,1683.52 -102.01,1683.52 -75,1710.53 -71.87,1710.53 -59.34,1698 -59.34,1694.87 -80.07,1674.13 -80.07,1662.16 -68,1650.09 -64.25,1646.34 -39.86,1621.95 -39.75,1621.95 -37.94,1620.14 -35.88,1618.19 -26.52,1616.67 -21.38,1616.67 112.79,1634.22 114.25,1634.42 114.89,1634.42 220.03,1621.99 223.54,1618.48 232.43,1609.59 v1(235.41,1609.59) ; BTB_3.63@2024.83,33.17 v1(2024.83,102.6)
  Bottom Layer w5.15: v1(235.41,1609.59) 237.35,1609.59 243.27,1615.51 498.72,1671.41 507.6,1671.41 625.73,1648.13 817.36,1609.8 1361.15,1066.01 1363.2,1063.96 1366.94,1060.22 1389.18,767.1 1389.24,766.23 1389.24,765.85 1369.93,498.57 1369.93,492.13 1374.12,487.94 1472.9,389.16 1474.41,387.65 1496.91,387.28 1501.08,387.65 1644.49,404.75 1645.1,404.75 1646.48,404.59 1771.98,389.8 1775.49,386.29 1826.08,335.69 2026.57,135.2 2026.57,104.34 v1(2024.83,102.6)
PCIE30_PORT1_TX1N_R: C192.2 J20.B20 | length 361.5
  Bottom Layer w5.15: J20.B20@-801.64,1812.03 -794.34,1804.73 -780.97,1804.73 -779.54,1803.3 -616.86,1803.3 -572.36,1847.8 -467.4,1847.8 C192.2@-463.7,1851.5
PCIE30_PORT1_TX1P: BTB_3.62 C191.1 | length 3959.7
  Top Layer w5.15: v1@-424.3,1888.6 -411,1875.3 -279.95,1875.3 -274.5,1869.85 -274.5,1869.75 -241.03,1836.27 -237.28,1832.53 -233.01,1832.53 -212.28,1853.26 -201.44,1853.26 -183.47,1835.28 -183.47,1824.44 -210.48,1797.44 -210.48,1794.3 -197.95,1781.77 -194.81,1781.77 -167.8,1808.78 -156.97,1808.78 -138.99,1790.8 -138.99,1779.97 -166,1752.96 -166,1749.83 -153.47,1737.3 -150.34,1737.3 -123.33,1764.31 -112.49,1764.31 -94.51,1746.33 -94.51,1735.49 -121.52,1708.48 -121.52,1705.35 -108.99,1692.82 -105.86,1692.82 -78.85,1719.83 -68.01,1719.83 -50.04,1701.85 -50.04,1691.01 -70.77,1670.28 -70.77,1666.02 -61.42,1656.67 -57.67,1652.92 -32.09,1627.34 -24.46,1626.1 -22.73,1625.82 -21.98,1625.82 112.73,1643.45 113.66,1643.57 115.43,1643.57 231.93,1629.8 v1(234.9,1629.8) ; BTB_3.62@2044.52,33.17 v1(2044.52,102.6)
  Bottom Layer w5.15: v1(234.9,1629.8) 265.76,1629.8 497.73,1680.56 508.49,1680.56 821.15,1618.95 1372.06,1068.04 1376.09,1064.01 1376.09,1060.56 1398.35,767.11 1398.39,766.57 1398.39,765.52 1379.08,498.24 1379.08,495.92 1383.54,491.46 1478.2,396.8 1500.53,396.8 1643.95,413.9 1645.25,413.91 1647.71,413.91 1671.97,410.8 1672.04,410.79 1772.51,398.94 1775.77,398.94 1779.71,395 2035.72,138.99 2035.72,113.84 2044.52,105.04 v1(2044.52,102.6)
  other v1: -425.04,1888.1
PCIE30_PORT1_TX1P_R: C191.2 J20.B19 | length 351.1
  Bottom Layer w5.15: J20.B19@-722.9,1851.4 -722.9,1842.6 -742.7,1822.8 -742.7,1818.53 -739.08,1814.9 -622,1814.9 -609.31,1827.59 ccw(c-624.47,1851.4) -600.66,1836.24 -576.15,1860.75 -492.35,1860.75 -474.22,1878.88 -473.62,1878.88 -465,1887.5 C191.2@-465,1888.1
PCIE30X1_0_CLKREQN_M0: BTB_1.49 R145.1 | length 976.3
  Top Layer w6.16: v1(443.3,519.3) 443.3,430.3 509.4,364.2 987.6,364.2 1077.9,273.9 1092.4,273.9 1104.37,261.93 BTB_1.49@1104.37,195.65
  Layer 4 w5.61: v1(443.3,519.3) 497.7,519.3 v1(523,544.6)
PCIE30X1_0_PERSTN_M0: BTB_3.27 R144.2 | length 1389
  Top Layer w6.16: v1(1790.2,114.2) 1790.8,114.8 1790.8,116.8 1808.3,134.3 BTB_3.27@1808.3,190.65
  Layer 4 w5.61: v1(1015.4,618.8) 1015,618.8 1014.8,619 1094.3,619 1163.7,549.6 1163.7,400 1200.9,362.8 1743.8,362.8 1754.16,352.44 1754.16,292.66 1731.5,270 1731.5,232.6 1790.2,173.9 v1(1790.2,114.2)
  Bottom Layer w5.61: v1(1015.4,618.8) 1015.4,564.1 1031.38,548.12 1031.38,544.94 1039.42,536.9 R144.2@1042.6,536.9
PCIE30X1_0_WAKEN_M0: BTB_3.17 R148.1 | length 1425.1
  Top Layer w6.16: v1(1609.93,242.33) 1610.69,241.57 1610.69,191.41 BTB_3.17@1611.45,190.65
  Layer 4 w5.61: v1(526.5,515.8) 526.5,512.95 529.79,509.66 529.79,508.8 930.9,508.8 1016.41,594.31 1081.89,594.31 1121.4,554.8 1121.4,383.6 1177.28,327.72 1401.28,327.72 1468.4,260.6 1596.41,260.6 1599.7,257.31 1599.7,256.55 1603.67,252.59 1603.67,251.45 1609.93,245.18 v1(1609.93,242.33)
PCIE30X2_CLKREQN_M1: BTB_2.73 R248.1 | length 1387.9
  Top Layer w6.16: v1(685,2387.2) 690.98,2393.18 BTB_2.73@690.98,2477.17
  Bottom Layer w6.16: R248.1@-425.62,2127.1 -416.9,2135.82 -416.9,2184.2 -406.04,2195.06 -406.04,2220.26 -387.3,2239 -387.1,2239 -375.35,2250.75 -375.35,2308.75 -341.47,2342.63 -101.85,2342.63 -100.16,2344.32 281.12,2344.32 313.45,2376.65 655.62,2376.65 666.17,2387.2 v1(685,2387.2)
PCIE30X2_PERSTN_M1: BTB_2.75 J20.A11 | length 1532.2
  Top Layer w6.16: v1(651.3,2412.2) 651.61,2412.51 BTB_2.75@651.61,2477.17
  Bottom Layer w6.16: J20.A11@-624.47,2245.1 -564.48,2185.1 -447.41,2185.1 -443.8,2188.71 -443.8,2312.3 -393.15,2362.95 -110.26,2362.95 -108.57,2364.64 231.34,2364.64 278.9,2412.2 v1(651.3,2412.2)
PCIE30X2_WAKEN_M1: BTB_2.74 R247.1 | length 1292.2
  Top Layer w6.16: BTB_2.74@671.3,2477.17 671.3,2418.4 675.7,2414 v1(675.7,2411.3)
  Bottom Layer w6.16: R247.1@-424.92,2212.5 -416.2,2221.22 -416.2,2225.07 -391,2250.27 -391,2317.1 -355.31,2352.79 -106.06,2352.79 -104.36,2354.48 256.88,2354.48 297.6,2395.2 659.8,2395.2 675.7,2411.1 v1(675.7,2411.3)
PCIE30X4_CLKREQN_M1: BTB_2.72 J19.52 | length 1881.3
  Top Layer w6.16: v1(28.21,1453.17) 43.5,1455.1 110.8,1455.1 147.9,1418 231.7,1418 258.7,1445 258.7,1634.6 242.7,1650.6 210,1650.6 185.4,1675.2 185.4,1727.3 v1(186.7,1728.6) ; v1(260.1,1732.3) 259.8,1732.6 259.8,1947.4 284.3,1971.9 455.3,1971.9 473.3,1989.9 473.3,2291 520,2337.7 677.7,2337.7 710.67,2370.67 BTB_2.72@710.67,2477.17
  Bottom Layer w6.16: J19.52@-43.2,1415.7 -42.2,1416.7 -0.31,1416.7 13.31,1430.32 16.91,1433.92 27.16,1445.3 27.16,1452.11 v1(28.21,1453.17) ; v1(186.7,1728.6) 253.7,1728.6 257.4,1732.3 v1(260.1,1732.3)
PCIE30X4_PERSTN_M1: BTB_2.77 J19.50 | length 1747.9
  Top Layer w6.16: v1(292.9,1438.1) 288.7,1442.3 288.7,1657.8 241.3,1705.2 234.5,1712 234.5,1964.9 260.7,1991.1 441.8,1991.1 461.4,2010.7 461.4,2302 509,2349.6 586.8,2349.6 612.24,2375.04 BTB_2.77@612.24,2477.17
  Bottom Layer w6.16: J19.50@-49.3,1439.3 -15,1439.3 -7.7,1446.6 -7.7,1461.89 -1.27,1468.32 93.18,1468.32 123.4,1438.1 v1(292.9,1438.1) ; J19.50@-46.8,1435.6 J19.50@-46.2,1436.2
PCIE30X4_WAKEN_M1: BTB_2.84 J19.54 | length 1642.4
  Top Layer w6.16: v1(11.5,1395.2) 229.4,1395.2 269,1434.8 269,1648.6 204.4,1713.2 204.4,1982.7 234.8,2013.1 434.3,2013.1 446,2024.8 446,2306.8 474.69,2335.49 474.69,2336.71 474.57,2336.83 474.57,2477.05 BTB_2.84@474.45,2477.17
  Bottom Layer w6.16: J19.54@-58.2,1397.02 -57.29,1396.11 10.59,1396.11 v1(11.5,1395.2)
PCIEx4_REF_CLKN: J20.A14 R239.2 R240.1 | length 676.2
  Bottom Layer w4.29: J20.A14@-545.73,2048.25 -516.65,2077.33 -420.3,2077.33 -386.53,2111.1 -386.53,2205.47 -351,2241 -131.33,2241 -107.02,2216.69 -78.34,2216.69 -73.8,2221.23 -73.8,2250.09 -93.78,2270.07 v1(-93.88,2270.07)
PCIEx4_REF_CLKN_R: R239.1 U26.13 | length 52.5
  Top Layer w4.29: R239.1@-53.32,2268.97 -49.9,2272.38 U26.13@-2.19,2272.38
PCIEx4_REF_CLKP: J20.A13 R238.2 R241.1 | length 671.1
  Bottom Layer w4.29: J20.A13@-624.47,2087.62 -424.56,2087.62 -396.82,2115.36 -396.82,2209.74 -355.26,2251.29 -182.37,2251.29 -180.23,2251.29 -177.72,2253.8 -177.72,2256.07 -175.59,2258.2 -158.55,2258.2 -156.43,2256.07 -156.43,2253.8 -153.91,2251.29 -147.18,2251.29 -127.07,2251.29 -108.4,2232.62 -97,2232.62 v1(-93.88,2235.73)
PCIEx4_REF_CLKP_R: R238.1 U26.14 | length 56.2
  Top Layer w4.29: R238.1@-53.32,2234.63 -41.16,2246.79 U26.14@-2.19,2246.79
PDn: R224.2 U26.7
  other v1: 230.58,2243.83
PHY1_LED1: J7.14 R72.1 U3.33 | length 1393.7
  Top Layer w6.16: J7.14@-701.4,-52.9 -652.53,-4.03 -652.53,122.97 -493.8,281.7 -416.2,281.7 -165.4,532.5 -98,532.5 -49.4,581.1 3.29,581.1 14.12,570.27 v1(14.12,570.17) ; U3.33@222.26,550.54 222.74,550.06 222.74,534 225.37,531.37 v1(225.37,528.67)
  Bottom Layer w6.16: v1(14.12,570.17) 14.12,570.44 2.02,582.55 2.02,586.9 0.2,588.72 0.2,601.48 11.73,613 182.76,613 199.7,596.06 199.7,584.95 222.74,561.91 222.74,552.88 R72.1@231.46,544.16
PHY1_LED2: J7.12 R73.1 U3.34 | length 1082.4
  Top Layer w6.16: -701.42,332.53 -620.03,332.53 -591.8,304.3 -416.8,304.3 -178.44,542.66 -102.21,542.66 -49.67,595.2 v1(15.35,595.2)
  Bottom Layer w6.16: v1(15.35,595.2) 175.08,595.2 206.51,563.77 v1(206.51,534.54)
PWR_ON: BTB_1.84 R19.2 | length 4548.1
  Top Layer w6.16: v1@459.8,690.4 513.58,744.18 928.72,744.18 1092.2,580.7 1386.3,580.7 1466.6,661 1646.8,661 1705.8,602 1868,602 1938.6,531.4 1990.19,531.4 1991.26,532.47 2012.63,532.47 v1(2013.7,531.4) ; BTB_1.84@474.45,44.15 474.45,104.1 ; v1(2208.2,1941.1) 2415.4,1941.1 2463.3,1989 2463.3,2062.2 v1(2464.2,2063.1)
  Bottom Layer w6.16: 462.4,622.8 v1(462.4,687.8) ; 463.5,622.8 491,595.3 491,132 v1(471.7,112.7) ; v1(2013.7,531.4) 2013.7,604.45 2018.2,608.95 2018.2,1832.3 2127,1941.1 v1(2208.2,1941.1) ; v1(2464.2,2063.1) 2480.6,2079.5 R19.2@2732.12,2079.5
RECOVERY_KEY: BTB_4.84 R2.2 | length 1671.4
  Top Layer w6.16: BTB_4.84@1611.45,2472.17 1613.29,2470.33 1613.29,2427.21 1643.59,2396.91 1643.59,2319.02 1647.2,2315.41 v1(1854.29,2315.41)
  Layer 4 w5.61: v1(1854.29,2315.41) 1872.37,2333.5 1913.8,2333.5 1944.4,2302.9 1944.4,2299.87 1961.34,2282.93 v1(1961.34,2204.13)
  Bottom Layer w6.16: v1(1961.34,2204.13) 1961.34,2062.66 1981.3,2042.7 2646.4,2042.7 2713.54,1975.56 2713.54,1957.23 2713.44,1957.13 2713.44,1855.78 R2.2@2732.62,1836.6